# EAGLE board mega16_spg5Vonly (EAGLE 6.5.0)
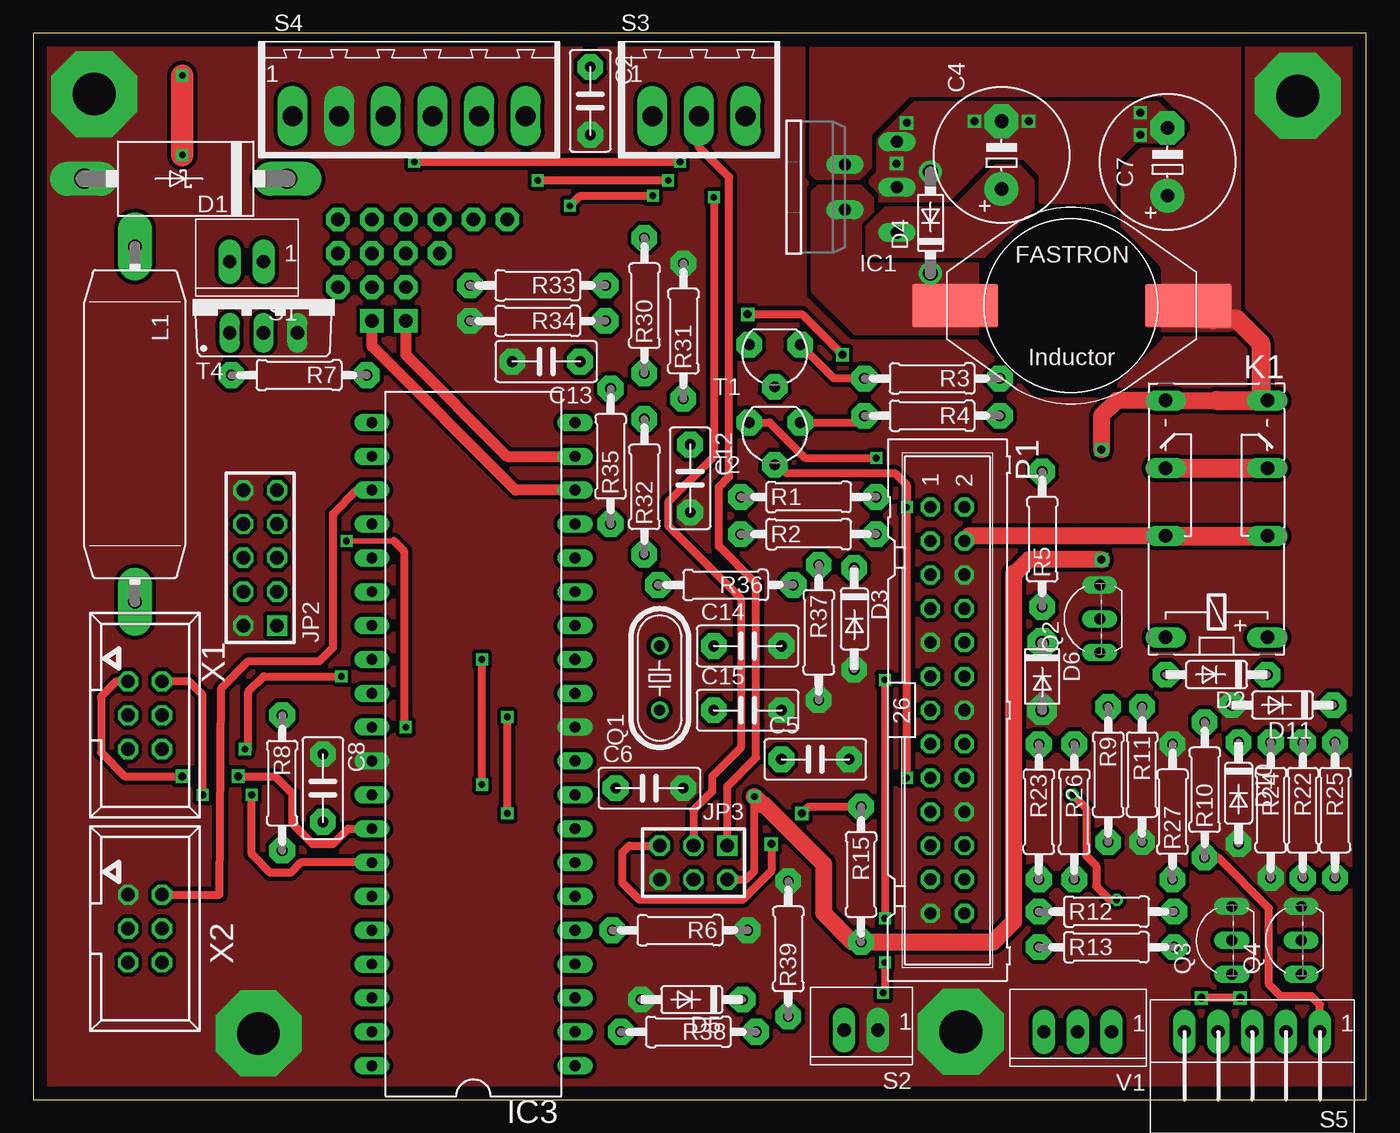
[diagram p0: board, top side]
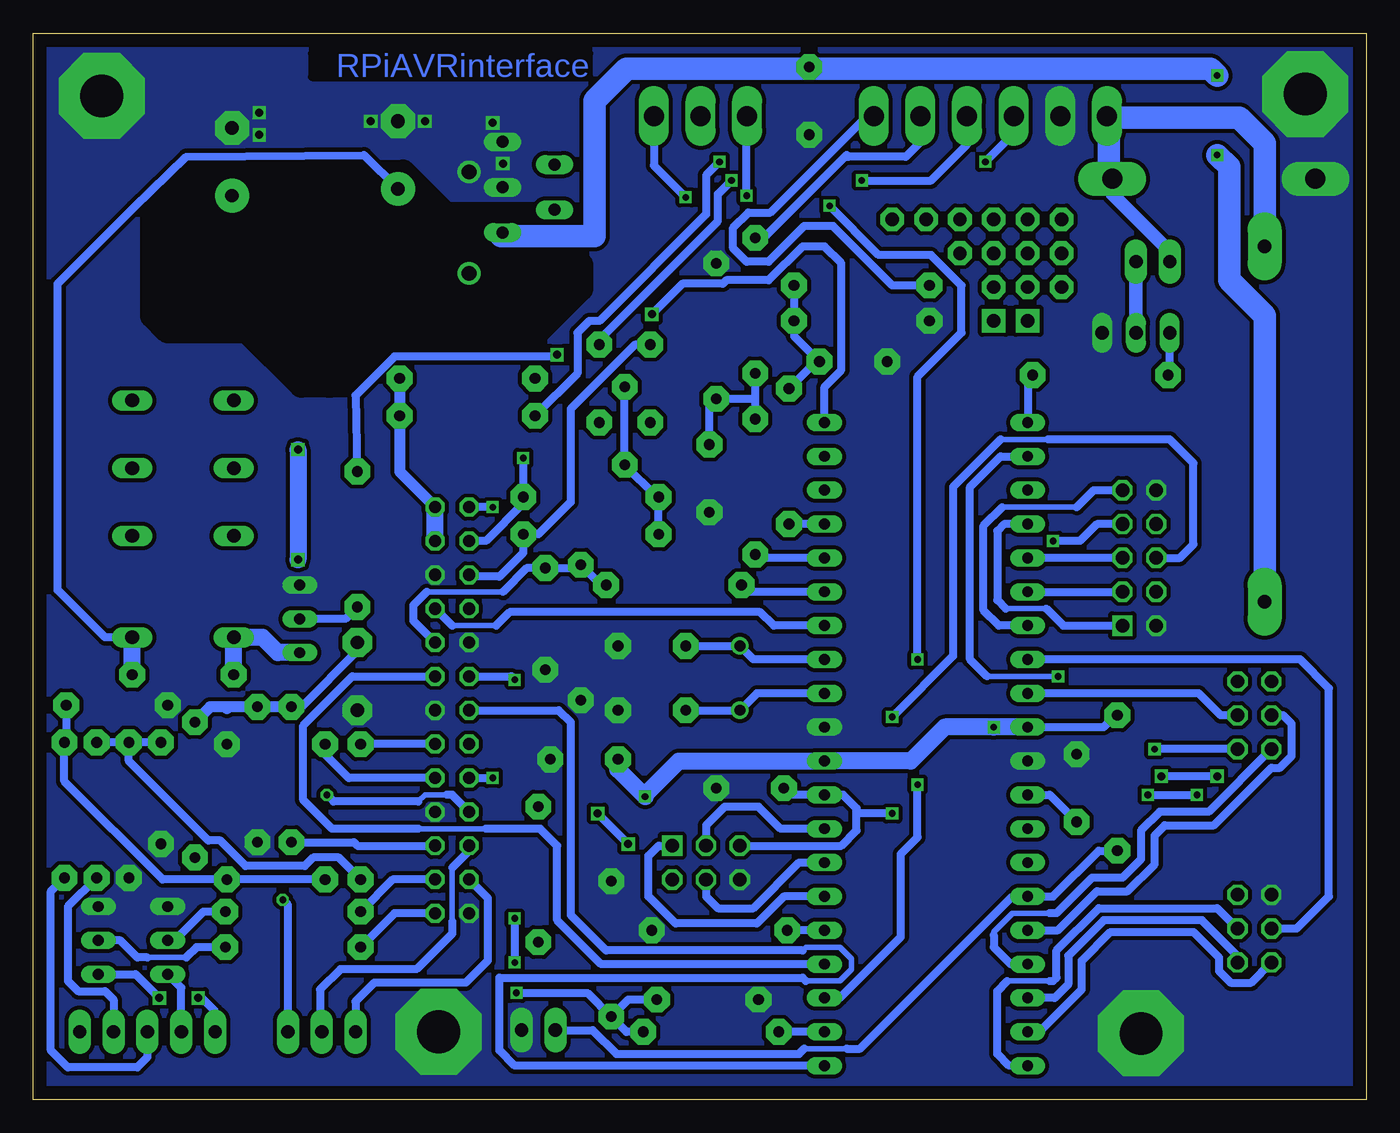
[diagram p1: board, bottom side, seen from below]

Size 100 x 80 mm. Coordinates in mm from the lower left corner, seen from the top.
Outline: 0,0 100,0 100,80 0,80 0,0
Copper layers (1*16): Top 0.035mm / dielectric 1.5mm / Bottom 0.035mm
Design rules "default": minimum track width 10mil, minimum drill 24mil, track to track 8mil, track to pad 8mil, pad to pad 8mil, via to via 8mil, smd to smd 8mil, copper to edge 40mil, drill to drill 8mil, minimum pad ring 10mil, minimum via ring 8mil, stop-mask expansion 4mil, vias tented up to drill 0mil, thermal gap 10mil
tRestrict: area 71.6,53.6 to 83.9,66.3
bRestrict: area 58.9,53.6 to 91.1,69.6

## Footprints (pad centres in the part's own frame; a part is rotated, then mirrored left to right if it is on the bottom)
C_50_SCHMAL = drill 0.8 pad 1.93 octagon: 1 -2.54,0; 2 2.54,0
E5-10,5 = drill 1.016 pad 2.54: + -2.54,0 | drill 1.016 pad 2.54 octagon: - 2.54,0
E5-10.5 = drill 1 pad 2.54: + -2.54,0 | drill 1 pad 2.54 octagon: - 2.54,0
DO201T15 = drill 1.5 pad 2.54 long: A 7.62,0; C -7.62,0
DO35-7,5 = drill 0.8 pad 1.93 octagon: A 3.81,0; C -3.81,0
DO41-7.6 = drill 1.1 pad 1.7: A 3.81,0; C -3.81,0
DO41-5 = drill 1 pad 2.184 octagon: A 2.54,0; C -2.54,0
TO220-5 = drill 0.9 long: 1 -3.4,-8.4; 2 -1.7,-4.5; 3 0,-8.4; 4 1.7,-4.5; 5 3.4,-8.4
DIL40 = drill 0.813 long: 1 -24.13,-7.62; 2 -21.59,-7.62; 3 -19.05,-7.62; 4 -16.51,-7.62; 5 -13.97,-7.62; 6 -11.43,-7.62; 7 -8.89,-7.62; 8 -6.35,-7.62; 9 -3.81,-7.62; 10 -1.27,-7.62; 11 1.27,-7.62; 12 3.81,-7.62; 13 6.35,-7.62; 14 8.89,-7.62; 15 11.43,-7.62; 16 13.97,-7.62; 17 16.51,-7.62; 18 19.05,-7.62; 19 21.59,-7.62; 20 24.13,-7.62; 21 24.13,7.62; 22 21.59,7.62; 23 19.05,7.62; 24 16.51,7.62; 25 13.97,7.62; 26 11.43,7.62; 27 8.89,7.62; 28 6.35,7.62; 29 3.81,7.62; 30 1.27,7.62; 31 -1.27,7.62; 32 -3.81,7.62; 33 -6.35,7.62; 34 -8.89,7.62; 35 -11.43,7.62; 36 -13.97,7.62; 37 -16.51,7.62; 38 -19.05,7.62; 39 -21.59,7.62; 40 -24.13,7.62
AVR-JTAG-10 = drill 1.016 square: 1 -5.08,-1.27 | drill 1.016 octagon: 2 -5.08,1.27; 3 -2.54,-1.27; 4 -2.54,1.27; 5 0,-1.27; 6 0,1.27; 7 2.54,-1.27; 8 2.54,1.27; 9 5.08,-1.27; 10 5.08,1.27
AVR-ISP-6 = drill 1.016 square: 1 -2.54,-1.27 | drill 1.016 octagon: 2 -2.54,1.27; 3 0,-1.27; 4 0,1.27; 5 2.54,-1.27; 6 2.54,1.27
G6A-234P = drill 1.016 long: 1 -3.81,-3.81; 16 -3.81,3.81; O1 8.89,-3.81; O2 8.89,3.81; P1 3.81,-3.81; P2 3.81,3.81; S1 13.97,-3.81; S2 13.97,3.81
MESC26 = drill 1 pad 2.54 long: 1 -13.335,0; 2 13.335,0
ML26 = drill 0.914 octagon: 1 -15.24,-1.27; 2 -15.24,1.27; 3 -12.7,-1.27; 4 -12.7,1.27; 5 -10.16,-1.27; 6 -10.16,1.27; 7 -7.62,-1.27; 8 -7.62,1.27; 9 -5.08,-1.27; 10 -5.08,1.27; 11 -2.54,-1.27; 12 -2.54,1.27; 13 0,-1.27; 14 0,1.27; 15 2.54,-1.27; 16 2.54,1.27; 17 5.08,-1.27; 18 5.08,1.27; 19 7.62,-1.27; 20 7.62,1.27; 21 10.16,-1.27; 22 10.16,1.27; 23 12.7,-1.27; 24 12.7,1.27; 25 15.24,-1.27; 26 15.24,1.27
HC49/S = drill 0.813: 1 -2.413,0; 2 2.413,0
TO92-EBC = drill 0.813 long: B 0,-1.27; C -2.54,-1.27; E 2.54,-1.27
R_10 = drill 0.8 pad 1.93 octagon: 1 -5.08,0; 2 5.08,0
CON-PLATINE_2-POLIG-GERADE = drill 1 pad 1.676 long: 1 -1.27,0; 2 1.27,0
RIA-183-03 = drill 1.5 pad 2.032 long: 1 -5.25,0; 2 -1.75,0; 3 1.75,0
RIA-183-06 = drill 1.5 pad 2.032 long: 1 -8.75,0; 2 -5.25,0; 3 -1.75,0; 4 1.75,0; 5 5.25,0; 6 8.75,0
CON-PLATINE_5-POLIG = drill 1 pad 1.676 long: 1 -5.08,0; 2 -2.54,0; 3 0,0; 4 2.54,0; 5 5.08,0
SOT54E = drill 0.8 pad 1.93 octagon: D -1.905,-0.635; G 0,2.54; S 1.905,-0.635
TO220BV = drill 1 long: D 0,-2.54; G -2.54,-2.54; S 2.54,-2.54
PISR = smd 6.452 x 3.251: P$1 -8.7,0; P$2 8.8,0
CON-PLATINE_3-POLIG-GERADE = drill 1 pad 1.676 long: 1 -2.54,0; 2 0,0; 3 2.54,0
057-006-1 = drill 1 octagon: 1 -2.54,-1.27; 2 -2.54,1.27; 3 0,-1.27; 4 0,1.27; 5 2.54,-1.27; 6 2.54,1.27

## Placement (x,y rotation side)
C2  100n  [C_50_SCHMAL]  41.78,74.93 270 top
C4  470u  [E5-10,5]  72.64,70.87 90 top
C5  100n  [C_50_SCHMAL]  58.67,25.53 0 top
C6  100n  [C_50_SCHMAL]  46.23,23.37 0 top
C7  330u  [E5-10.5]  85.09,70.36 90 top
C8  100n  [C_50_SCHMAL]  21.72,23.37 270 top
C12  22n  [C_50_SCHMAL]  49.28,46.61 270 top
C13  22n  [C_50_SCHMAL]  38.48,55.37 180 top
C14  22p  [C_50_SCHMAL]  53.59,34.04 0 top
C15  22p  [C_50_SCHMAL]  53.59,29.21 0 top
D1  15KE18D  [DO201T15]  11.43,69.09 180 top
D2  1N4148-7,5  [DO35-7,5]  88.77,31.88 180 top
D3  [DO35-7,5]  61.59,36.07 270 top
D4  1N5819-B  [DO41-7.6]  67.31,65.79 90 top
D5  [DO35-7,5]  49.4,7.49 180 top
D6  1N4004-5  [DO41-5]  75.69,31.75 270 top
D10  [DO35-7,5]  90.42,22.99 270 top
D11  [DO35-7,5]  93.73,29.59 180 top
IC1  LM2575T  [TO220-5]  56.39,68.45 90 top
IC3  MEGA16-P  [DIL40]  33.02,26.67 90 top
JP2  AVR-JTAG-10  [AVR-JTAG-10]  17.02,40.64 90 top
JP3  AVR-ISP-6  [AVR-ISP-6]  49.53,17.78 180 top
K1  G6A-234P  [G6A-234P]  88.77,38.48 90 top
L1  47u  [MESC26]  7.62,50.67 270 top
P1  [ML26]  68.58,29.21 270 top
Q1  [HC49/S]  46.99,31.62 90 top
Q2  BC546B  [TO92-EBC]  78.74,36.07 90 top
Q3  BC546A  [TO92-EBC]  88.65,11.94 90 top
Q4  BC546A  [TO92-EBC]  93.85,11.94 90 top
R1  10k  [R_10]  58.17,45.21 0 top
R2  10k  [R_10]  58.17,42.42 0 top
R3  10k  [R_10]  67.44,54.1 180 top
R4  10k  [R_10]  67.44,51.31 180 top
R5  1k  [R_10]  75.69,42.04 90 top
R6  10k  [R_10]  48.51,12.7 180 top
R7  100  [R_10]  19.94,54.36 180 top
R8  2k7  [R_10]  18.67,23.75 270 top
R9  47k  [R_10]  80.64,24.38 270 top
R10  47k  [R_10]  87.88,23.24 90 top
R11  22k  [R_10]  83.19,24.38 270 top
R12  100  [R_10]  80.52,14.1 0 top
R13  100  [R_10]  80.52,11.43 0 top
R15  25k  [R_10]  62.1,16.89 270 top
R22  47k  [R_10]  95.25,21.72 270 top
R23  47k  [R_10]  75.44,21.59 270 top
R24  22k  [R_10]  92.84,21.72 270 top
R25  47k  [R_10]  97.66,21.72 270 top
R26  47k  [R_10]  78.11,21.59 270 top
R27  22k  [R_10]  85.47,21.59 90 top
R30  47k  [R_10]  45.85,59.56 90 top
R31  22k  [R_10]  48.77,57.66 90 top
R32  47k  [R_10]  45.85,45.97 90 top
R33  47k  [R_10]  37.85,61.09 180 top
R34  22k  [R_10]  37.85,58.42 180 top
R35  47k  [R_10]  43.31,48.26 90 top
R36  10k  [R_10]  51.94,38.61 180 top
R37  20k  [R_10]  58.93,35.05 270 top
R38  10k  [R_10]  49.15,5.08 180 top
R39  20k  [R_10]  56.64,11.3 90 top
S1  Lüfter  [CON-PLATINE_2-POLIG-GERADE]  16,62.87 180 top
S2  kty  [CON-PLATINE_2-POLIG-GERADE]  62.1,5.21 180 top
S3  3W  [RIA-183-03]  51.69,73.79 0 top
S4  [RIA-183-06]  28.19,73.79 0 top
S5  GENIO  [CON-PLATINE_5-POLIG]  91.44,5.08 180 top
T1  BS170  [SOT54E]  55.63,56.01 180 top
T2  BS170  [SOT54E]  55.63,50.16 180 top
T4  IRLZ34N  [TO220BV]  17.27,60.07 0 top
U$1  PISR  [PISR]  77.85,59.56 0 top
V1  SPI3,3V  [CON-PLATINE_3-POLIG-GERADE]  78.36,5.08 180 top
X1  MFD_Tasten_rechts  [057-006-1]  8.38,28.83 270 top
X2  MFD_Tasten_links  [057-006-1]  8.38,12.83 270 top

## Library data of the parts
C2 C5-C8 C12-C15 D1-D3 D5 D6 D10 D11 L1 R1-R13 R15 R22-R27 R30-R39 S1-S5 T1 T2 T4 V1 = 0_eigene
C4 = rcl
D4 = diode
IC1 = v-reg-3
IC3 JP2 JP3 = avr-5
K1 = relay; OC_FARNELL: unknown; OC_NEWARK: unknown
P1 = con-harting-ml
Q1 = crystal
Q2-Q4 = transistor-npn
U$1 = inductor_FASTRON
X1 X2 = con-panduit

## Nets
3W_CLK: IC3.8 JP3.3 S3.3
3W_DATA: IC3.6 JP3.1 S3.2
3W_EN: IC3.3 S3.1
12V: D1.C L1.1 S4.1
+3V3: P1.1 P1.17 R1.1 R2.1 T1.G T2.G
+5V0: C5.1 C7.+ IC1.4 IC3.10 IC3.30 JP2.7 JP3.2 K1.S1 K1.S2 R8.1 R15.2 U$1.P$2
AMP: R33.2 S4.6
AMP_IN: IC3.17 R35.1
CE0N: P1.24 R12.1
CE1N: P1.26 R13.1
GND: C2.2 C4.- C5.2 C6.2 C7.- C8.1 C12.2 C13.2 C14.2 C15.2 D1.A D3.A D4.A D5.A D6.A D10.A D11.A IC1.3 IC1.5 IC3.11 IC3.31 JP2.2 JP2.10 JP3.6 P1.6 P1.9 P1.14 P1.20 P1.25 Q2.E Q3.E Q4.E R6.1 R11.2 R24.2 R27.2 R31.2 R34.2 R37.2 R39.2 S2.1 S4.2 T4.S X2.1
GPIO4: P1.7
GPIO17: D5.C P1.11 R38.1 R39.1
GPIO18: IC3.4 P1.12
GPIO22: P1.15
GPIO23: P1.16 R23.1
GPIO24: P1.18 R26.1
GPIO25: P1.22 R9.2
GPIO27: IC3.1 P1.13
LüFTER: IC3.21 R7.1
MISO: P1.21 V1.2
MOSI: P1.19 V1.1
N$1: S1.2
N$2: D2.A K1.16 Q2.C
N$3: C2.1 C4.+ D2.C IC1.1 K1.1 L1.2
N$4: R7.2 T4.G
N$5: D4.C IC1.2 U$1.P$1
N$6: C15.1 IC3.12 Q1.1
N$7: C8.2 IC3.32
N$8: S1.1 T4.D
N$9: D6.C R9.1 R10.2 R11.1
N$10: IC3.15 R36.2
N$11: IC3.24 JP2.1
N$12: IC3.25 JP2.5
N$13: Q2.B R5.1
N$14: IC3.5 R6.2
N$15: IC3.26 JP2.3
N$16: IC3.20 R5.2
N$17: IC3.27 JP2.9
N$18: Q4.C S5.5
N$19: Q3.C S5.4
N$20: IC3.7 JP3.4
N$21: R22.2 S5.2
N$22: R25.2 S5.3
N$23: D10.C R22.1 R23.2 R24.1
N$24: D11.C R25.1 R26.2 R27.1
N$25: Q3.B R12.2
N$26: R10.1 S5.1
N$27: Q4.B R13.2
N$28: K1.P1 K1.P2 P1.2 P1.4 R3.1 R4.1
N$29: K1.O1 K1.O2
N$30: IC3.19
N$31: IC3.18
N$45: C14.1 IC3.13 Q1.2
N$50: C12.1 R30.1 R31.1 R32.2
N$52: C13.1 R33.1 R34.1 R35.2
PI_SHUTDOWN: IC3.2 R38.2
RESET: C6.1 IC3.9 JP2.6 JP3.5 R15.1
RPI_TEMPERATUR: IC3.35 R8.2 S2.2
RXD0: D3.C P1.10 R36.1 R37.1
SCK: P1.23 V1.3
SCL_3: P1.5 R2.2 T1.S
SCL_5: R3.2 S4.4 T1.D
SDA_3: P1.3 R1.2 T2.S
SDA_5: R4.2 S4.3 T2.D
TASTE_DREHGEBER_L: IC3.33 X1.1
TASTE_DREHGEBER_R: IC3.34 X1.2
TASTE_FAHNE: IC3.23 X2.2
TASTE_INFO: IC3.28 X2.3
TASTE_NAVI: IC3.29 X1.4
TASTE_VERKEHR: IC3.22 X1.6
TASTEN_A: IC3.40 X2.4
TASTEN_B: IC3.39 X2.5
TASTEN_C: IC3.38 X2.6
TASTEN_D: IC3.37 X1.5
TASTEN_E: IC3.36 X1.3
TXD0: IC3.14 P1.8
ZV_AUF: R30.2 S4.5
ZV_AUF_IN: IC3.16 R32.1

## Tracks (layer width: path | path; a pad name or v marks a point on that pad's centre or on a via)
3W_CLK  (via drill 0.5)
  Top 0.61: v51.05,67.69 51.05,48.26 47.62,44.83 47.62,43.05 53.09,37.59 53.09,26.42 50.93,24.26 50.93,23.11 49.53,21.72 JP3.3
  Bottom 0.61: IC3.8 43.94,20.32 45.59,21.97 48.13,21.97 49.53,20.57 JP3.3 | S3.3 53.44,70.08 v51.05,67.69
3W_DATA
  Top 0.61: JP3.1 52.07,23.5 54.23,25.65 54.23,38.73 51.44,41.53 51.44,45.97 52.2,46.74 52.2,69.22 49.91,71.5 49.91,73.76 S3.2
  Bottom 0.61: IC3.6 43.69,15.24 45.72,13.21 51.82,13.21 53.85,15.24 53.85,18.29 53.09,19.05 JP3.1
3W_EN  (via drill 0.5)
  Top 0.61: v33.66,23.62 v33.66,33.02 | v40.26,67.06 41.02,67.82 v46.48,67.82
  Bottom 0.61: IC3.3 39.5,7.62 34.92,12.19 34.92,18.41 33.66,19.68 v33.66,23.62 | v33.66,33.02 33.66,54.23 30.35,57.53 30.35,61.09 32.64,63.37 36.58,63.37 v40.26,67.06 | v46.48,67.82 46.48,73.74 S3.1
12V
  Bottom 1.016: 19.43,73.77 S4.1
  Bottom 1.676: L1.1 7.62,71.75 9.53,73.66 19.32,73.66 | 19.32,73.66 S4.1 | 19.32,73.66 19.32,69.36 D1.C
+3V3  (via drill 0.5)
  Top 0.61: v65.53,24.13 v65.53,44.45 65.53,46.1 64.64,46.99 56.52,46.99 55.88,47.62 T2.G
  Bottom 0.61: P1.17 v65.53,24.13 | v65.53,44.45 P1.1 | R2.1 R1.1 53.21,45.21 T2.G T1.G
+5V0  (via drill 0.5, 0.6)
  Top 0.406: v23.5,41.91 27.05,41.91
  Top 0.61: JP3.2 53.47,16.51 54.1,17.14 v54.1,22.73 | 27.05,41.91 27.81,41.15 27.81,28.07 v27.94,27.94
  Top 1.27: 73.53,39.5 73.53,39.37 | 73.53,39.37 73.53,13.34 72.01,11.81 R15.2 61.98,11.81 61.47,11.81 59.31,13.97 59.31,17.65 54.86,22.1 54.74,22.1 v54.1,22.73 | U$1.P$2 87.63,58.58 88.03,58.69 88.52,58.42 | 88.77,52.45 K1.S2 81.28,52.45 80.14,51.31 v80.14,48.77 | v80.14,40.51 74.68,40.51 73.53,39.37
  Top 1.422: 88.77,52.45 92.2,52.45 | 92.2,52.45 K1.S1 | 87.63,58.58 90.26,58.58 92.08,56.77 92.08,52.58 92.2,52.45
  Bottom 0.61: JP3.2 51.94,16.51 | v54.1,22.73 54.1,22.86 | JP2.7 20.19,43.18 21.46,41.91 v23.5,41.91 | IC3.30 19.68,27.94 18.67,28.96 R8.1
  Bottom 1.27: IC3.30 v27.94,27.94 31.62,27.94 34.16,25.4 IC3.10 51.56,25.4 54.1,22.86 | C5.1 56.13,24.77 v54.1,22.73 | v80.14,48.77 v80.14,40.51
  pour Top (rank 2, no thermals): 90.42,58.04 90.42,78.87 58.42,78.87 58.42,69.6 58.8,69.22 61.98,69.22 62.74,69.98 62.74,72.52 65.66,75.44 84.84,75.44 87,73.28 87,72.64 85.6,71.25 83.19,71.25 81.79,69.85 81.79,59.44 83.44,57.78 89.66,57.78
AMP
  Bottom 0.61: R33.2 35.56,61.09 40.01,65.53 42.16,65.53 44.83,62.87 46.48,62.87 47.5,63.88 47.5,65.41 46.35,66.55 44.7,66.55 37.47,73.79 S4.6
AMP_IN
  Bottom 0.61: IC3.17 R35.1
CE0N
  Bottom 0.61: P1.24 73.03,16.51 R12.1
CE1N
  Bottom 0.61: P1.26 72.9,13.97 R13.1
GND  (via drill 0.6, 3.2 pad 6.45)
  other vias: 4.57,75.44 69.6,5.08 94.87,75.31 16.89,4.95 70.61,73.41 74.68,73.41 83.06,72.39 83.06,74.04 64.77,70.23 65.53,73.28
  pour Bottom (isolate 0.305, no thermals): 0,80.01 100.33,80.01 100.33,0 0,0
  pour Top (isolate 0.305, rank 6, no thermals): 100.33,80.14 0,80.14 0,0.13 100.33,0.13
GPIO17  (via drill 0.5)
  Top 0.61: v63.88,31.5 v63.88,13.59 | v63.88,10.29 63.88,8.13 v63.75,8
  Bottom 0.61: R38.1 55.5,5.08 R39.1 | D5.C 55.37,7.49 R39.1 | P1.11 64.14,31.75 v63.88,31.5 | v63.88,13.59 v63.88,10.29 | v63.75,8 58.42,8 R39.1
GPIO18
  Bottom 0.406: 66.04,20.32 71.12,20.32
  Bottom 0.61: IC3.4 57.4,10.16 60.71,13.46 60.71,19.05 61.98,20.32 66.04,20.32 | 71.12,20.32 77.6,20.32 79.76,22.48 79.76,28.07 76.07,31.75 P1.12
GPIO23
  Bottom 0.61: P1.16 R23.1
GPIO24
  Bottom 0.61: P1.18 76.33,24.13 78.11,25.91 R26.1
GPIO25
  Bottom 0.61: R9.2 75.95,19.3 75.69,19.05 P1.22
GPIO27
  Bottom 0.406: 42.04,8.89 39.5,8.89 38.61,9.78 38.61,10.54 39.5,11.43 42.04,11.43 42.29,11.18
  Bottom 0.61: IC3.1 63.88,2.54 65.02,3.68 65.02,9.14 42.29,9.14 42.04,8.89 | 42.29,11.18 57.02,11.18 59.69,13.84 59.69,28.32 60.58,29.21 P1.13
LüFTER
  Bottom 0.61: R7.1 25.15,54.36 25.4,54.1 IC3.21
MISO
  Bottom 0.406: 68.58,17.4 68.58,13.34
  Bottom 0.61: P1.21 67.31,18.67 68.58,17.4 | 68.58,13.34 68.58,12.45 71.25,9.78 76.96,9.78 78.49,8.26 78.49,5.21 V1.2
MOSI  (via drill 0.5)
  Top 0.61: v77.98,22.86 78.99,21.84 78.99,18.29 79.76,17.53 79.76,16 80.77,14.99 v81.28,14.99
  Bottom 0.406: 68.96,22.86 70.61,22.86 71.12,22.35
  Bottom 0.61: P1.19 68.58,22.86 68.96,22.86 | 71.12,22.35 77.47,22.35 v77.98,22.86 | V1.1 80.9,14.61 v81.28,14.99
N$1
  Bottom 1.016: S1.2 14.73,63.63 19.05,67.94
N$2
  Bottom 1.27: D2.A K1.16 82.8,34.67 81.66,33.53 Q2.C
N$3  (via drill 0.5)
  Top 1.676: v11.18,70.87 v11.18,76.83
  Bottom 0.406: C2.1 41.78,77.34
  Bottom 0.61: K1.1 94.61,34.67 98.17,38.23 98.17,61.21 92.46,66.93 88.52,70.74 75.18,70.87 C4.+
  Bottom 1.27: 64.9,64.77 64.76,65.02 IC1.1 | D2.C K1.1
  Bottom 1.676: L1.2 7.62,58.8 10.29,61.47 10.29,69.98 v11.18,70.87 | v11.18,76.83 11.68,77.34 41.78,77.34 55.5,77.34 57.91,74.93 57.91,64.77 64.9,64.77
  pour Top (no thermals): 72.14,63.37 74.93,66.17 74.93,68.96 73.91,69.98 72.26,69.98 69.09,66.8 64.01,66.8 62.61,65.41 62.61,63.37
N$4
  Bottom 0.61: R7.2 14.73,54.36 T4.G
N$5
  pour Top (no thermals): 72.14,57.53 72.14,62.61 62.36,62.61 61.98,62.99 61.98,65.79 62.87,66.67 62.87,67.56 61.98,68.45 58.93,68.45 58.55,68.07 58.55,60.71 61.72,57.53
N$6
  Bottom 0.61: IC3.12 45.72,30.48 Q1.1 C15.1
N$7
  Bottom 0.61: IC3.32 23.75,22.86 C8.2
N$8
  Bottom 1.016: T4.D S1.1
N$9
  Bottom 0.61: D6.C 75.69,33.66 79.88,29.46 R9.1
  Bottom 0.813: R9.1 R11.1 85.34,29.46 | 85.34,29.46 86.74,29.46 R10.2 | 85.47,29.34 85.34,29.46
N$10
  Bottom 0.61: IC3.15 46.35,38.1 R36.2
N$11
  Bottom 0.406: 27.05,36.83 24,36.83
  Bottom 0.61: IC3.24 27.18,43.18 27.69,42.67 27.69,37.47 27.05,36.83 | 24,36.83 22.73,35.56 JP2.1
N$12
  Bottom 0.61: JP2.5 IC3.25
N$13
  Bottom 0.61: R5.1 76.58,36.07 Q2.B
N$14
  Bottom 0.61: IC3.5 R6.2
N$15
  Bottom 0.61: IC3.26 JP2.3
N$16  (via drill 0.6)
  Top 0.61: v53.59,58.93 57.66,58.93 v60.71,55.88
  Bottom 0.61: IC3.20 40.64,53.47 39.37,54.74 39.37,62.74 40.64,64.01 42.29,64.01 44.83,61.47 48.01,61.47 48.26,61.21 51.31,61.21 v53.59,58.93 | v60.71,55.88 60.83,55.75 72.9,55.75 75.82,52.83 R5.2
N$17
  Bottom 0.406: 27.3,44.45 21.72,44.45
  Bottom 0.61: IC3.27 27.56,35.56 28.7,36.7 28.7,43.05 27.3,44.45 | 21.72,44.45 20.45,45.72 JP2.9
N$18  (via drill 0.6)
  Top 0.61: v90.55,7.62 v87.63,7.62
  Bottom 0.61: Q4.C 92.33,9.4 v90.55,7.62 | v87.63,7.62 87.38,7.62 86.36,6.6 S5.5
N$19
  Bottom 0.61: S5.4 88.9,8.38 Q3.C
N$20
  Bottom 0.61: JP3.4 49.53,15.24 48.64,14.35 45.97,14.35 42.55,17.78 IC3.7
N$21
  Bottom 0.61: R22.2 97.41,14.48 97.41,8.89 96.65,8.13 94.61,8.13 93.98,7.49 S5.2
N$22
  Bottom 0.61: S5.3 91.44,3.17 92.2,2.41 97.41,2.41 98.68,3.68 98.68,15.62 R25.2
N$23
  Bottom 0.61: D10.C R24.1 | R24.1 R22.1 | R23.2 77.09,18.16 78.99,18.16 79.63,17.53 84.07,17.53 85.98,19.43 86.87,19.43 92.84,25.4 R24.1
N$24
  Bottom 0.61: R26.2 R27.1 85.98,16.51 90.3,16.51 97.66,23.88 R25.1 97.54,26.92 D11.C
N$25
  Bottom 0.61: R12.2 87.25,14.1 89.41,11.94 Q3.B
N$26
  Top 0.61: S5.1 96.52,7.11 95.89,7.75 93.6,7.75 92.71,8.64 92.71,14.35 88.9,18.16 R10.1
N$27
  Bottom 0.406: 88.52,10.67 91.44,10.67
  Bottom 0.61: R13.2 87.76,11.43 88.52,10.67 | 91.44,10.67 92.2,10.67 93.47,11.94 Q4.B
N$28
  Top 1.27: K1.P2 70.23,42.29 P1.4
  Top 1.422: K1.P2 K1.P1
  Bottom 0.813: R3.1 R4.1 72.52,47.12 P1.2
  Bottom 1.27: P1.4 P1.2
N$29
  Top 1.422: K1.O2 K1.O1
N$30  (via drill 1 pad 1.78)
  Top 0.813: v27.94,58.42 27.94,55.88 35.56,48.26 IC3.19
N$31  (via drill 1 pad 1.78)
  Top 0.813: IC3.18 36.2,45.72 25.4,56.52 v25.4,58.42
N$32  (via drill 1 pad 1.78)
  other vias: 25.4,60.96
N$33  (via drill 1 pad 1.78)
  other vias: 27.94,60.96
N$34  (via drill 1 pad 1.78)
  other vias: 27.94,63.5
N$35  (via drill 1 pad 1.78)
  other vias: 25.4,63.5
N$36  (via drill 1 pad 1.78)
  other vias: 25.4,66.04
N$37  (via drill 1 pad 1.78)
  other vias: 27.94,66.04
N$38  (via drill 1 pad 1.78)
  other vias: 30.48,66.04
N$39  (via drill 1 pad 1.78)
  other vias: 30.48,63.5
N$40  (via drill 1 pad 1.78)
  other vias: 22.86,63.5
N$41  (via drill 1 pad 1.78)
  other vias: 22.86,66.04
N$42  (via drill 1 pad 1.78)
  other vias: 22.86,60.96
N$43  (via drill 1 pad 1.78)
  other vias: 33.02,66.04
N$44  (via drill 1 pad 1.78)
  other vias: 35.56,66.04
N$45
  Bottom 0.61: IC3.13 45.97,33.02 Q1.2 C14.1
N$50
  Bottom 0.61: R30.1 45.85,52.7 | 45.85,52.7 R32.2 | 45.85,52.7 45.97,52.58 R31.1 49.28,52.07 C12.1
N$52
  Bottom 0.61: R33.1 R34.1 42.93,57.28 C13.1 41.27,55.37 R35.2
PI_SHUTDOWN
  Bottom 0.61: IC3.2 R38.2
RESET  (via drill 0.5, 0.6)
  Top 0.61: v35.56,28.7 v35.56,21.46 | R15.1 58.17,21.97 v57.66,21.46 | v55.37,19.18 55.37,17.14 53.21,14.99 45.47,14.99 44.2,16.26 44.2,18.54 44.7,19.05 JP3.5
  Bottom 0.406: 23.88,49.53 27.43,49.53
  Bottom 0.61: JP3.5 39.37,19.05 38.23,20.19 38.23,21.34 | 38.23,21.34 38.23,21.84 39.24,22.86 IC3.9 43.18,22.86 C6.1 | JP2.6 13.97,40.64 12.95,41.66 12.95,47.75 14.73,49.53 23.88,49.53 | 27.43,49.53 30.99,45.97 30.99,33.27 v35.56,28.7 | v35.56,21.46 38.1,21.46 38.23,21.34 | v57.66,21.46 v55.37,19.18
RPI_TEMPERATUR
  Bottom 0.406: 42.16,3.81 38.99,3.81
  Bottom 0.61: R8.2 20.07,18.67 23.5,15.24 IC3.35 26.54,15.24 37.97,3.81 38.99,3.81 | S2.2 58.04,5.21 56.26,3.43 42.55,3.43 42.16,3.81
RXD0
  Bottom 0.406: 64.77,38.1 70.48,38.1
  Bottom 0.61: R36.1 57.4,38.61 R37.1 59.18,39.88 D3.C 62.99,39.88 64.77,38.1 | 70.48,38.1 71.5,37.08 71.5,35.94 P1.10
SCK
  Bottom 0.61: P1.23 65.91,15.11 65.91,10.41 67.56,8.76 74.42,8.76 75.82,7.37 V1.3
SCL_3
  Bottom 0.61: P1.5 67.18,39.24 65.02,39.24 63.25,41.02 R2.2 62.1,42.42 59.69,44.83 59.69,51.82 54.86,56.64 T1.S
SCL_5  (via drill 0.5)
  Top 0.61: R3.2 60.07,54.1 T1.D | v47.62,68.96 v37.85,68.96
  Bottom 0.61: 29.94,74.27 S4.4 29.97,73.76 29.97,71.63 32.64,68.96 v37.85,68.96 | T1.D 57.53,57.02 48.64,65.91 48.64,67.94 v47.62,68.96
SDA_3  (via drill 0.5)
  Top 0.61: T2.S 55.24,50.8 57.91,48.13 v63.25,48.13
  Bottom 0.61: P1.3 66.04,41.91 63.25,44.7 R1.2 v63.25,48.13
SDA_5  (via drill 0.5)
  Top 0.61: T2.D 61.85,50.8 R4.2 | v28.57,70.36 v48.51,70.36
  Bottom 0.61: S4.3 26.44,72.49 v28.57,70.36 | v48.51,70.36 49.53,69.34 49.53,66.42 57.53,58.42 58.29,58.42 59.18,57.53 59.18,54.48 R4.2
TASTE_DREHGEBER_L  (via drill 0.6)
  Top 0.61: X1.1 6.22,31.37 5.08,30.23 5.08,26.04 6.86,24.26 v11.18,24.26 | v15.37,24.26 18.16,24.26 19.43,22.99 19.43,20.7 20.95,19.18 22.48,19.18 23.62,20.32 IC3.33
  Bottom 0.61: v11.18,24.26 v15.37,24.26
TASTE_DREHGEBER_R  (via drill 0.5)
  Top 0.61: IC3.34 20.07,17.78 19.3,17.02 17.78,17.02 16.38,18.41 v16.38,22.86 | v12.7,22.86 12.7,30.35 11.68,31.37 X1.2
  Bottom 0.61: v16.38,22.86 v12.7,22.86
TASTE_FAHNE
  Top 0.61: X2.2 13.97,15.37 14.1,30.86 16.13,32.89 21.46,32.89 22.48,33.91 22.48,43.94 24.26,45.72 IC3.23
TASTE_INFO
  Bottom 0.61: IC3.28 4.95,33.02 2.79,30.86 2.79,15.24 5.21,12.83 X2.3
TASTE_NAVI
  Bottom 0.61: X1.4 10.92,28.83 12.57,30.48 IC3.29
TASTE_VERKEHR  (via drill 0.5)
  Top 0.61: v15.88,26.29 16.13,26.29 16.13,30.61 17.27,31.75 v23.11,31.75
  Bottom 0.406: v23.11,31.75 28.45,31.75
  Bottom 0.61: X1.6 v15.88,26.29 | 28.45,31.75 29.72,33.02 29.72,45.97 27.43,48.26 IC3.22
TASTEN_A
  Bottom 0.406: 26.92,8.89 23.75,8.89
  Bottom 0.61: IC3.40 26.8,2.54 27.69,3.43 27.69,8.13 26.92,8.89 | 23.75,8.89 23.5,8.89 23.24,9.14 23.24,11.18 20.07,14.35 11.18,14.35 X2.4
TASTEN_B
  Bottom 0.61: IC3.39 24.51,5.08 21.34,8.26 21.34,10.41 19.18,12.57 12.95,12.57 11.05,10.67 11.05,9.65 10.16,8.76 8.64,8.76 X2.5
TASTEN_C
  Bottom 0.61: X2.6 9.65,10.79 12.32,13.46 19.68,13.46 22.35,10.79 22.35,8.64 23.37,7.62 IC3.38
TASTEN_D
  Bottom 0.406: 23.75,13.97 26.54,13.97 27.94,12.57 27.94,12.32
  Bottom 0.61: X1.5 11.81,21.59 15.49,21.59 16.89,20.19 16.89,18.03 18.29,16.64 20.57,16.64 23.24,13.97 23.75,13.97 | 27.94,12.32 27.94,11.43 26.67,10.16 IC3.37
TASTEN_E
  Bottom 0.61: IC3.36 23.11,12.7 20.19,15.62 17.91,15.62 15.88,17.65 15.88,19.81 15.11,20.57 11.43,20.57 7.11,24.89 6.48,24.89 5.59,25.78 5.59,28.19 6.22,28.83 X1.3
TXD0
  Bottom 0.406: 68.58,35.56 65.28,35.56
  Bottom 0.61: IC3.14 44.45,35.56 45.47,36.58 64.26,36.58 65.28,35.56 | P1.8 68.58,35.56
ZV_AUF
  Bottom 0.61: R30.2 45.21,64.64 38.99,70.87 38.86,70.74 34.54,70.74 33.44,71.84 S4.5
ZV_AUF_IN
  Bottom 0.61: IC3.16 45.59,40.64 R32.1

## Text on the board
Bottom: RPiAVRinterface